# EAGLE board Lora AC Dimmer v1.2 (EAGLE 6.1)
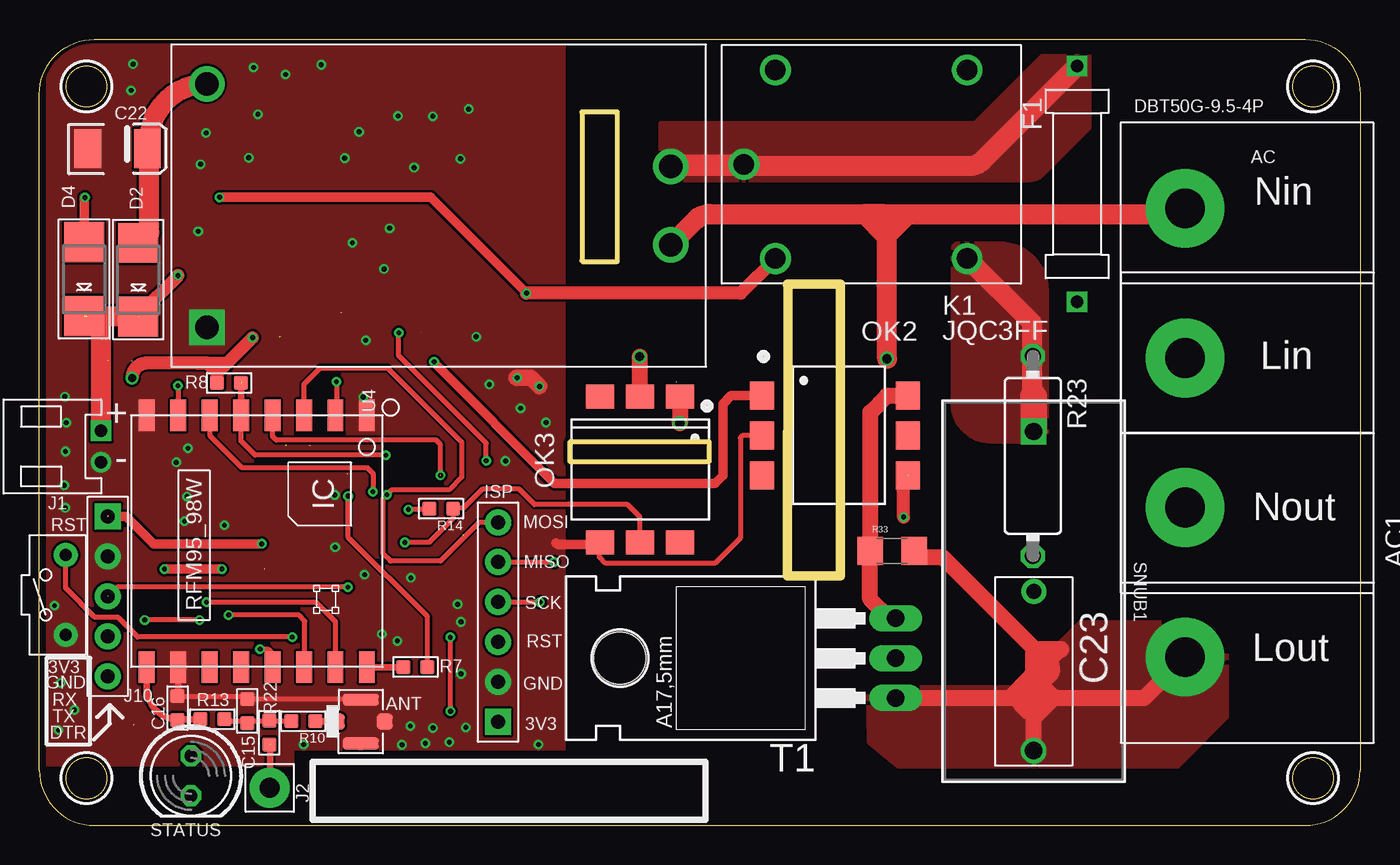
[diagram p0: board, top side]
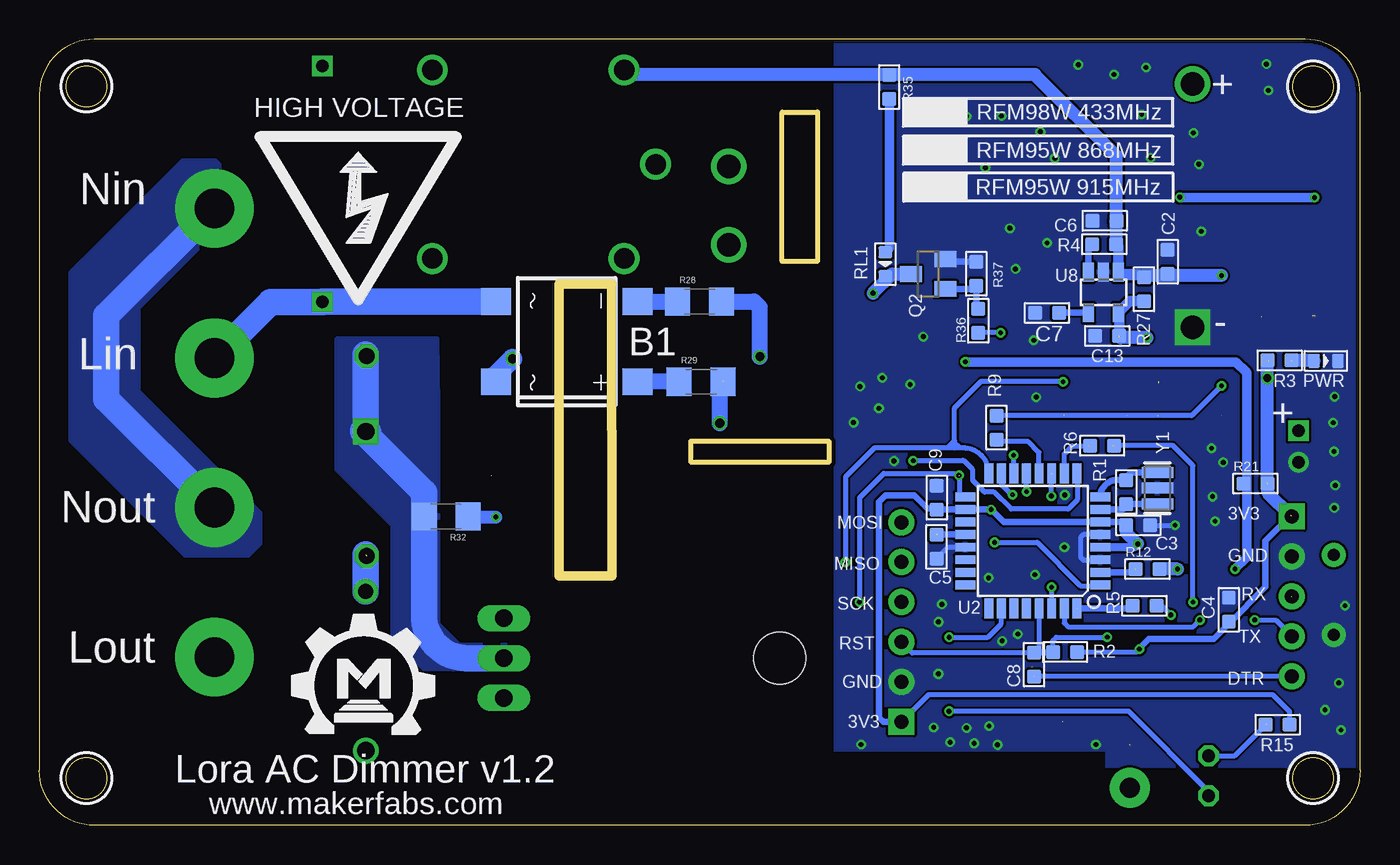
[diagram p1: board, bottom side, seen from below]

Size 84 x 50 mm. Coordinates in mm from the lower left corner, seen from the top.
Outline: 47.6,34.41 47.56,15.87 50.95,15.87 50.94,34.41 47.59,34.42 47.58,34.37
Outline: 33.78,24.42 42.57,24.42 42.57,23.13 33.76,23.13 33.76,24.41
Outline: 34.48,45.38 34.51,45.36 34.51,35.9 34.53,35.88 36.74,35.88 36.77,35.9 36.77,45.35 36.74,45.37 34.5,45.37
Outline: 0,3.5 0,46.5 arc-90 3.5,50 80.5,50 arc-90 84,46.5 84,3.5 arc-90 80.5,0 3.5,0 arc-90 0,3.5
Outline: circle at 81,3 radius 1.3
Outline: circle at 81,47 radius 1.3
Outline: circle at 3,3 radius 1.3
Outline: circle at 3,47 radius 1.3
Copper layers (1*16): Top 0.035mm / dielectric 1.5mm / Bottom 0.035mm
Design rules: minimum track width 6mil, minimum drill 12mil, track to track 6mil, track to pad 6mil, pad to pad 6mil, via to via 6mil, smd to smd 0mil, copper to edge 10mil, drill to drill 10mil, minimum pad ring 10mil, minimum via ring 6mil, stop-mask expansion 2mil, vias tented up to drill 100mil, thermal gap 0mil
Net classes: 0 default: width 0.152 mm, drill 0.305 mm, clearance 0.152 mm; 1 AC High Current: width 2.54 mm, drill 25.4 mm, clearance 1.27 mm; 2 gnd: width 0.305 mm, drill 0.559 mm, clearance 0.254 mm; 3 usbvcc: width 0.508 mm, drill 0.61 mm, clearance 0.254 mm
tRestrict: area 16.3,0 to 52.3,4.7; 5 lines
bRestrict: area 16.3,0 to 52.3,4.7; 2 lines

## Footprints (pad centres in the part's own frame; a part is rotated, then mirrored left to right if it is on the bottom)
THROUGH-HOLE-9.5 = drill 2.5 pad 5: 1 -9.5,0; 2 0,0; 3 9.5,0
4P-U-FL = smd 1.016 x 1.016: D -1.524,0; GND3 1.524,0 | smd 2.286 x 0.762: GND1 0,1.397; GND2 0,-1.397
DBS = smd 1.7 x 1.9: + -2.55,-4.5; - 2.55,-4.5; AC1 -2.55,4.5; AC2 2.55,4.5
0603 = smd 0.889 x 0.889: 1 -0.762,0; 2 0.762,0
EIA3528-KIT = smd 1.7 x 2.5: A 1.9,0; C -1.9,0
DISCRETE_C0512/10.18 = drill 0.95 pad 1.6: P$1 -5.09,0; P$2 5.09,0
SMADIODE = smd 2.54 x 2.54: A 2.349,0; C -2.349,0
FUSE01 = drill 0.8 square: P$1 -7.5,0; P$2 7.5,0
1X6P-2.54-8.5-BLACK-FEMALE = drill 0.889 pad 1.651 square: 1 0,6.35 | drill 0.889 pad 1.651: 2 0,3.81; 3 0,1.27; 4 0,-1.27; 5 0,-3.81; 6 0,-6.35
PH2.0-2P-90-DIP = drill 0.8 square: 1 0,1 | drill 0.8: 2 0,-1
1P-100/50MIL = drill 1.27 pad 2.54: 1 0,0
5P-2.54 = drill 0.889 pad 1.651 square: 1 0,5.08 | drill 0.889 pad 1.651: 2 0,2.54; 3 0,0; 4 0,-2.54; 5 0,-5.08
DIP5_JQC3FF = drill 1.3: 1 0,12; 2 -2,6; 3 0,0; 4 12.2,12; 5 12.2,0
DIL6-SMD = smd 1.78 x 1.52: 1 -2.54,-4.645; 2 0,-4.645; 3 2.54,-4.645; 4 2.54,4.645; 5 0,4.645; 6 -2.54,4.645
LED-0603 = smd 0.762 x 0.889: + -0.762,0; - 0.762,0
SOT23 = smd 1 x 1.4: 1 -0.95,-1.1; 2 0.95,-1.1; 3 0,1.1
R0603 = smd 0.889 x 0.889: 1 -0.762,0; 2 0.762,0
V234/12 = drill 1.016 octagon: 1 -6.35,0; 2 6.35,0
1206 = smd 1.6 x 1.8: 1 -1.4,0; 2 1.4,0
2P-7.62X3.56-90D = drill 0.762 pad 1.524: P$1 0,2.54; P$2 0,-2.54
RES_P409CP104M275AH151_KEM = drill 1.092 pad 1.6 square: 1 0,0 | drill 1.092 pad 1.6: 2 20.295,0
LED5MM = drill 0.813 octagon: A -1.27,0; K 1.27,0
TO220AB = drill 1.118 long: 1 -2.54,-6.35; 2 0,-6.35; 3 2.54,-6.35 | hole 3.302: 0,11.176
TQFP32 = smd 1.27 x 0.559: 1 -4.293,2.8; 2 -4.293,2; 3 -4.293,1.2; 4 -4.293,0.4; 5 -4.293,-0.4; 6 -4.293,-1.2; 7 -4.293,-2; 8 -4.293,-2.8; 17 4.293,-2.8; 18 4.293,-2; 19 4.293,-1.2; 20 4.293,-0.4; 21 4.293,0.4; 22 4.293,1.2; 23 4.293,2; 24 4.293,2.8 | smd 0.559 x 1.27: 9 -2.8,-4.293; 10 -2,-4.293; 11 -1.2,-4.293; 12 -0.4,-4.293; 13 0.4,-4.293; 14 1.2,-4.293; 15 2,-4.293; 16 2.8,-4.293; 25 2.8,4.293; 26 2,4.293; 27 1.2,4.293; 28 0.4,4.293; 29 -0.4,4.293; 30 -1.2,4.293; 31 -2,4.293; 32 -2.8,4.293
RFM92_93W = smd 2 x 1: 1 -8,7; 2 -8,5; 3 -8,3; 4 -8,1; 5 -8,-1; 6 -8,-3; 7 -8,-5; 8 -8,-7; 9 8,-7; 10 8,-5; 11 8,-3; 12 8,-1; 13 8,1; 14 8,3; 15 8,5; 16 8,7
HLK-PM01 = drill 1.5 square: GND 14.75,7.75 | drill 1.5: L -14.75,2.5; N -14.75,-2.5; VCC 14.75,-7.75
SOT23-5 = smd 0.69 x 1.2: 1 -0.95,-1.3; 2 0,-1.3; 3 0.95,-1.3; 4 0.95,1.3; 5 -0.95,1.3
RESONATOR = smd 0.7 x 2: 1 -1,0; 2 0,0; 3 1,0

## Placement (x,y rotation side)
AC  DBT50G-9.5-4P  [THROUGH-HOLE-9.5]  72.86,29.74 90 top
AC1  DBT50G-9.5-3P  [THROUGH-HOLE-9.5]  72.87,20.2 90 top
ANT  [4P-U-FL]  20.44,6.6 0 top
B1  DBLS201G  [DBS]  50.46,30.76 90 bottom
C2  10uF  [0603]  12.24,35.85 270 bottom
C3  100nF  [0603]  14.12,19.09 180 bottom
C4  10uF  [0603]  8.36,13.71 270 bottom
C5  100nF  [0603]  26.94,17.72 90 bottom
C6  10uF  [0603]  16.25,38.45 0 bottom
C7  NC  [0603]  19.92,32.59 0 bottom
C8  100nF  [0603]  20.74,10.23 90 bottom
C9  100nF  [0603]  26.92,20.86 270 bottom
C13  10uF  [0603]  16.09,31.14 0 bottom
C15  NC  [0603]  13.22,7.28 270 top
C16  NC  [0603]  8.79,7.46 270 top
C22  [EIA3528-KIT]  4.98,43.04 0 top
C23  0.01uF  [DISCRETE_C0512/10.18]  63.24,9.79 270 top
D2  SS24  [SMADIODE]  6.29,34.7 90 top
D4  SS24  [SMADIODE]  2.85,34.74 90 top
F1  FUSE01  [FUSE01]  66,40.8 270 top
ISP  CONNECTOR-HEADER-6P-3460270P1  [1X6P-2.54-8.5-BLACK-FEMALE]  29.18,12.93 180 top
J1  PH2.0-2P-90-DIP  [PH2.0-2P-90-DIP]  3.93,24.1 0 top
J2  [1P-100/50MIL]  14.66,2.38 0 top
J10  [5P-2.54]  4.35,14.56 0 top
K1  JQC3FF  [DIP5_JQC3FF]  46.81,36.05 0 top
OK2  MOC3021  [DIL6-SMD]  50.61,24.8 270 top
OK3  H11A1SM  [DIL6-SMD]  38.2,22.64 180 top
PWR  GREEN  [LED-0603]  2.17,29.55 0 bottom
Q2  [SOT23]  27.48,35.07 90 bottom
R1  1M  [R0603]  14.88,21.2 270 bottom
R2  10k  [R0603]  18.77,11.03 180 bottom
R3  330R  [R0603]  5.12,29.57 0 bottom
R4  1K  [R0603]  16.28,36.97 180 bottom
R5  0R  [R0603]  13.72,13.96 0 bottom
R6  0R  [R0603]  16.41,24.15 0 bottom
R7  0R  [R0603]  23.92,10.07 180 top
R8  100K  [R0603]  12.07,28.15 180 top
R9  0R  [R0603]  23.12,25.3 90 bottom
R10  0R  [R0603]  16.79,6.63 180 top
R12  100R  [R0603]  13.53,16.3 0 bottom
R13  0R  [R0603]  11,6.75 180 top
R14  10K  [R0603]  25.55,20.15 180 top
R15  330R  [R0603]  5.24,6.4 180 bottom
R21  10K  [R0603]  6.66,21.74 0 bottom
R22  0R  [R0603]  14.63,5.89 90 top
R23  150R  [V234/12]  63.19,23.5 270 top
R27  0R  [R0603]  13.75,34.11 270 bottom
R28  100k  [1206]  42.01,33.32 0 bottom
R29  100k  [1206]  41.91,28.22 0 bottom
R32  330R  [1206]  58.13,19.65 180 bottom
R33  330R  [1206]  54.24,17.46 0 top
R35  1K  [R0603]  29.95,46.96 270 bottom
R36  1K  [R0603]  24.29,32.1 90 bottom
R37  10K  [R0603]  24.41,35.09 90 bottom
RL1  BLUE  [LED-0603]  30.2,35.7 270 bottom
RST  [2P-7.62X3.56-90D]  1.68,14.66 180 top
SNUB1  100nF/150Ω  [RES_P409CP104M275AH151_KEM]  63.24,25.05 270 top
STATUS  [LED5MM]  9.65,3.15 270 top
T1  BT139  [TO220AB]  48.1,10.64 90 top
U2  ATMEGA328P  [TQFP32]  20.82,18.1 180 bottom
U4  RFM95_98W  [RFM92_93W]  13.84,18.07 270 top
U5  AC-DCHLK01  [HLK-PM01]  25.4,39.42 180 top
U8  SPX3819  [SOT23-5]  16.33,33.9 180 bottom
U$1  [MAKERFABS_0.3]  67.5,5.82 0 bottom
U$3  [HIGH-VOLTAGE-1.5]  63.72,40.68 180 bottom
Y1  CSTCE8M00 8MHZ  [RESONATOR]  12.89,21.45 90 bottom

## Library data of the parts
AC AC1 = self
ANT J1 J2 J10 = Connector
B1 = rectifier
C2-C9 C13 C15 C16 PWR R1-R10 R12-R15 R21 R22 R27 R35-R37 RL1 RST = Discrete
C22 = SparkFun-Capacitors
C23 = A9G
D2 D4 = adafruit
F1 = FUSE01
ISP = OPL Eagle Library
K1 = 1mytest
OK2 = optocoupler; MF: FAIRCHILD SEMICONDUCTOR; MPN: MOC3031SM; OC_FARNELL: unknown; OC_NEWARK: 34C1335
OK3 = optocoupler; OC_FARNELL: unknown; OC_NEWARK: unknown
Q2 = semicon-smd-ipc
R23 = adafruit2
R28 R29 R32 R33 = SparkFun-Resistors; K: 45K
SNUB1 = P409CP104M275AH151; BUILT_BY: EMA_Cory; COPYRIGHT: Copyright (C) 2018 Accelerated Designs. All rights reserved; DATASHEET: https://content.kemet.com/datasheets/KEM_F3089_P409_X2_275.pdf; MANUFACTURER_PART_NUMBER: P409CP104M275AH151; SOURCELIBRARY: Kemet_2020-05-21; VALUE: 100nF 150Ω; VENDOR: Kemet
STATUS = led
T1 = triac
U2 U8 = IC
U4 = dragino
U5 = Moja Knjižnica
U$1 U$3 = Logo
Y1 = SmartPrj

## Nets
3V3: C3.2 C4.2 C9.2 C13.2 ISP.1 J10.1 R2.1 R3.1 R8.2 R14.2 R15.1 R21.2 R27.2 U2.4 U2.6 U2.18 U4.13 U8.5
A0: U2.23
A1: U2.24
A2: U2.25
A3: STATUS.K U2.26
A4/SDA: U2.27
A5/SCL: U2.28
A6: U2.19
A7: U2.22
ANT: C16.2 R13.2 U4.9
AREF: C5.2 U2.20
D0/RX: J10.3 U2.30
D1/TX: J10.4 U2.31
D2/INT0: R5.1 U2.32
D3/INT1: OK3.5 R14.1 U2.1
D4: R12.1 U2.2
D5: R36.1 U2.9
D6: R6.1 U2.10
D7: R7.1 U2.11
D8: R9.1 U2.12
D9: U2.13 U4.6
D10: R8.1 U2.14 U4.5
D11/MOSI: ISP.6 U2.15 U4.3
D12/MISO: ISP.5 U2.16 U4.2
D13/SCK: ISP.4 U2.17 U4.4
DIO0: R5.2 U4.14
DIO1: R6.2 U4.15
DIO2: R7.2 U4.16
DIO5: R9.2 U4.7
DTR: C8.1 J10.5
GND: ANT.GND1 ANT.GND2 ANT.GND3 C2.1 C3.1 C4.1 C5.1 C6.1 C7.1 C9.1 C13.1 C15.1 C16.1 C22.C ISP.2 J1.2 J10.2 OK2.2 OK3.4 PWR.- Q2.2 R37.2 RST.P$1 U2.3 U2.5 U2.21 U4.1 U4.8 U4.10 U5.GND U8.2 Y1.2
L: AC1.3 AC.2 B1.AC2 F1.P$2
L_WIRE: F1.P$1 K1.2 U5.N
LINE: K1.5 R23.1 R32.2 SNUB1.1 T1.2
N: AC1.2 AC.1 AC.3 B1.AC1 U5.L
N$1: ANT.D R10.1
N$2: C23.P$1 R23.2
N$3: C7.2 U8.4
N$4: C15.2 R10.2 R13.1 R22.2
N$5: R15.2 STATUS.A
N$7: PWR.+ R3.2
N$9: AC1.1 C23.P$2 R33.2 SNUB1.2 T1.1
N$12: J2.1 R22.1
N$14: OK2.1 R12.2 R21.1
N$15: B1.- R28.1
N$16: OK2.4 R32.1
N$17: B1.+ R29.1
N$18: OK3.1 R29.2
N$19: OK3.2 R28.2
N$21: OK2.6 R33.1 T1.3
N$24: R4.2 U8.3
N$26: R35.2 RL1.+
N$27: D4.A K1.3 Q2.3 RL1.-
N$28: Q2.1 R36.2 R37.1
RESET: C8.2 ISP.3 R2.2 RST.P$2 U2.29
VCC: C22.A D2.A U5.VCC
VDD: C2.2 C6.2 D2.C D4.C J1.1 K1.1 R4.1 R27.1 R35.1 U8.1
XTAL1: R1.2 U2.7 Y1.1
XTAL2: R1.1 U2.8 Y1.3

## Tracks (layer width: path | path; a pad name or v marks a point on that pad's centre or on a via)
3V3  (via drill 0.3, 0.51)  (4 unrouted)
  Top 0.305: R14.2 24.73,20.09 v23.47,20.09 | v14.04,11.21 14.54,11.21 14.89,10.87 14.89,10.24 14.9,10.23 14.9,10.14 U4.13 | 10.1,29.41 10.67,29.41 arc-90 10.73,29.35
  Top 0.61: v14.15,17.91 7.28,17.91 5.54,19.65 J10.1
  Top 0.813: R8.2 11.31,28.77 | 11.31,28.77 v13.56,31.02 | 11.31,28.77 10.73,29.35 10.67,29.41 6.86,29.41 arc90 v5.9,28.45 | 10.1,29.41 11.93,29.41
  Bottom 0.305: v23.47,20.09 23.44,20.09 23.44,20.08 | R2.1 14.22,11.03 v14.04,11.21 | R15.1 4.48,7.22 5.57,8.31 27.45,8.31 ISP.1 | C4.2 8.36,12.93 8.38,12.93 8.38,12.8
  Bottom 0.406: v14.04,11.21 14.04,11.27 13.44,11.86 9.32,11.86 8.38,12.8 6.02,15.16 6.02,18.1 4.42,19.7 | ISP.1 30.33,6.58 30.33,6.59 30.61,6.87 30.61,20.56 30.19,20.98 28.35,20.98 27.51,20.14 26.94,20.14 26.91,20.17 26.91,20.11 C9.2 U2.18 arc-90 U2.18 25.1,20.09 v23.47,20.09 23.44,20.09 22.65,19.3 U2.6 15.09,19.3 C3.2 14.87,19.1 14.87,19.13
  Bottom 0.508: U2.4 14.36,17.7 v14.15,17.91
  Bottom 0.66: C13.2 15.32,32.55 U8.5 14.64,33.34 R27.2
  Bottom 0.813: v14.15,17.91 14.16,17.91 14.87,18.61 14.87,19.13 14.86,19.14 | v13.56,31.02 15.25,31.02 15.3,31.07 | 4.42,19.7 5.88,21.16 5.88,21.7 5.91,21.7 5.88,21.73 | R21.2 5.9,28.43 v5.9,28.45 5.9,29.49 arc90 5.88,29.51
A3  (via drill 0.3)
  Top 0.305: v26.15,7.26 v26.15,11.95 v26.14,11.96
  Bottom 0.305: STATUS.K 9.65,2.18 14.73,7.26 v26.14,7.26 v26.15,7.26 | v26.14,11.96 23.68,11.96 22.82,12.82 U2.26 | U2.26
ANT
  Top 0.406: R13.2 8.79,6.75 C16.2 8.82,6.7 8.82,6.74 arc-90 6.84,8.72 U4.9
AREF  (1 unrouted)
  Bottom 0.406: U2.20 26.93,18.5 arc-90 C5.2
D0/RX  (via drill 0.3)  (1 unrouted)
  Top 0.305: v19.62,15.15 4.98,15.15 4.39,14.56
  Bottom 0.305: U2.30 v19.62,15.15
D1/TX  (via drill 0.3)
  Top 0.305: v10.19,13.06 v6.71,13.06 v6.7,13.07
  Bottom 0.305: U2.31 18.82,12.88 18.58,12.64 10.62,12.64 v10.19,13.06 | 4.94,12.64 4.35,12.05 4.35,12.04 J10.4 4.36,12.04 5.38,13.07 v6.7,13.07
D2/INT0  (1 unrouted)
  Bottom 0.406: R5.1 14.64,13.81 U2.32
D3/INT1  (via drill 0.3)
  Top 0.305: OK3.5 38.2,19.63 37.42,20.41 31.48,20.41 30.5,21.39 28.2,21.39 26.98,20.18 26.34,20.18 R14.1 26.31,19.52 24.79,18 v23.25,18
  Bottom 0.305: v23.25,18 20.54,18 17.78,15.24 16.59,15.24 U2.1
D4  (1 unrouted)
  Bottom 0.406: U2.2 14.53,16.1 14.33,16.3
D5  (via drill 0.3)  (1 unrouted)
  Top 0.305: v28.42,23.19 28.42,24.32 22.86,29.88 v22.86,31.33
  Bottom 0.305: U2.9 17.99,22.36 17.99,20.68 18.56,20.11 22.2,20.11 23.28,21.2 23.89,21.2 24.64,21.94 24.64,22.62 25.21,23.2 25.28,23.2 | v28.42,23.19 25.28,23.19 25.28,23.2 | v22.86,31.33 22.87,31.34 24.29,31.34 | 25.34,23.2 25.3,23.2 25.28,23.2
D6  (1 unrouted)
  Bottom 0.305: U2.10 18.82,23.62 18.31,24.14 17.27,24.14 17.25,24.15
D7  (via drill 0.3)  (1 unrouted)
  Top 0.305: R7.1 24.68,13.28 19.64,18.32 v19.64,20.94 v19.64,20.95
  Bottom 0.305: v19.64,20.95 19.64,22.32 19.61,22.35
D8
  Bottom 0.305: U2.12 20.42,23.73 21.1,24.41 23,24.41 R9.1
D9  (via drill 0.3)
  Top 0.305: U4.6 10.84,24.79 12.88,22.75 20.86,22.75 U2.13 v21.22,21.23
  Bottom 0.305: v21.22,21.23 U2.13
D10  (via drill 0.3)  (2 unrouted)
  Top 0.305: v22.04,23.54 13.72,23.54 12.83,24.44 12.83,26 12.88,26.06
  Top 0.406: U4.5 12.84,28.22 12.83,28.22 12.86,28.22 12.92,28.16
  Bottom 0.305: U2.14 22.02,23.53 v22.04,23.54
D11/MOSI  (via drill 0.3)  (1 unrouted)
  Top 0.305: ISP.6 27.98,19.28 25.51,16.81 22.33,16.81 21.86,17.28 21.86,20.78 22.09,21.01 | U4.3 16.84,28.06 17.86,29.09 22.16,29.09 26.86,24.38 26.86,22.16 26.04,21.34 22.41,21.34 22.09,21.01 | v22.1,21.04 22.09,21.02 22.09,21.01
  Bottom 0.305: U2.15 22.81,21.67 22.18,21.04 v22.11,21.04
D12/MISO  (via drill 0.3)  (1 unrouted)
  Top 0.305: ISP.5 v32.74,16.74 | v18.89,28.22 18.89,26.15 18.81,26.07
  Bottom 0.305: 18.91,28.24 v18.89,28.22 18.93,28.25 24.09,28.25 25.79,26.56 25.79,24.43 | 25.79,24.03 25.79,24.33 | 25.79,24.33 25.79,24.43 | v32.74,16.74 32.72,16.76 32.72,22.18 30.89,24.01 25.79,24.01 arc90 25.79,24.01 25.79,24.03 | 26.24,24.01 26.24,24.02 25.8,24.45 25.79,24.43 | 23.65,22.76 23.65,22.42 U2.16 arc-90 25.26,24.03 25.79,24.03 | 25.46,24.02 25.82,24.39 25.82,24.37 arc-90 25.79,24.33
D13/SCK  (via drill 0.3)  (2 unrouted)
  Top 0.305: U4.4 14.83,26.05 14.83,24.75 15.07,24.51 25.23,24.51 25.52,24.23 v25.52,22.26 | ISP.4 31.7,14.2 v31.84,14.2
  Bottom 0.305: 25.49,22.26 25.61,22.39 30.29,22.39 31.84,20.84 v31.84,14.2 | 25.49,22.26 25.47,22.26 | 25.09,20.95 25.11,20.93 U2.17 25.15,20.9 25.2,20.95 25.48,20.95 25.5,20.96 25.5,22.25 25.49,22.26
DIO0  (via drill 0.3)
  Top 0.305: U4.14 16.88,10.12 16.88,13 16.51,13.38 v12.04,13.38
  Bottom 0.305: v12.04,13.38 12.62,13.96 13,13.96 13,13.95 13.01,13.95 12.98,13.95 R5.2
DIO1  (via drill 0.3)  (1 unrouted)
  Top 0.305: U4.15 18.84,12.95 17.6,14.19 10.64,14.19 v10.63,14.2
  Bottom 0.305: v10.63,14.2 10.63,22.88 11.91,24.16 15.72,24.16
DIO2  (1 unrouted)
  Top 0.406: R7.2 23.15,10.06 U4.16
DIO5  (via drill 0.3)  (1 unrouted)
  Top 0.305: v8.82,27.95 8.82,26.06 8.8,26.05
  Bottom 0.305: v8.82,27.95 10.71,26.07 23.22,26.07 23.21,26.06 R9.2
DTR  (1 unrouted)
  Bottom 0.305: J10.5 20.76,9.48 20.79,9.45
GND  (via drill 0.3)
  Top 0.305: 8.84,8.22 13.1,8.22 13.31,8.01 | C15.1 20.41,8.04 ANT.GND1 20.53,8 20.6,8.07 | U4.1 20.86,26.07 20.87,26.09 | OK2.2 44.73,24.8 44.59,24.66 44.59,18.29 42.97,16.67 36.02,16.67 35.62,17.07 35.62,17.87 35.63,17.88
  Top 0.406: C16.1 8.84,8.22 U4.10
  Top 0.61: 35.63,17.88 35.47,17.88 | 35.47,17.88 32.94,17.88 32.87,17.95 | OK3.4 35.59,18 35.47,17.88
  Top 1.016: v31.8,27.92 31.26,28.46 30.32,28.46 30.33,28.47 v30.39,28.47
  Bottom 0.305: C5.1 26.91,16.96 26.17,17.7 U2.21 | C3.1 11.79,19.09 v11.78,19.1 | U2.5 17.6,18.5 17.79,18.3 17.79,17.07 17.61,16.88 16.67,16.88 | 16.67,16.88 16.65,16.87 | U2.3 16.66,16.9 16.67,16.88 | v20.75,30.85 v20.76,30.85 v20.77,30.84
  Bottom 0.406: Q2.2 26.22,35.86 24.45,35.86
  other vias: 21.92,35.39 21.77,12.17 30.61,26.53 13.91,45.23 27.12,6.23 22.77,11.73 2.24,7.35 26.82,9.64 26.82,12.94 23.84,41.84 1.66,23.78 25.02,45.1 22.28,37.98 23.6,6.32 1.22,6.06 26.08,5.29 26.6,14.06 17.93,48.38 1.36,9.06 27.78,31.09 9.23,19.35 9.38,20.92 1.59,21.62 18.81,17.69 9.46,23.99 20.68,15.95 18.78,21.02 13.63,48.2 1.62,27.27 10.26,42.05 26.78,42.4 5.96,48.42 16.81,5.13 5.84,46.74 32.22,25.63 1.65,20.19 19.91,37.05 15.66,47.76 1.72,25.6 13.32,42.47 8.71,23.09 0.97,13.98 10.1,37.78 24.55,5.22 28.61,28.05 23.07,5.12 25.04,6.2 31.74,5.14 27.31,45.56 10.61,44.05 19.42,42.44 20.34,44.12 22.81,45.13 23.63,15.75 20.6,27.24 29.64,23.18
  pour Bottom: -1.06,51.63 33.33,51.63 33.33,3.81 -1.06,3.81 -1.06,51.62
  pour Top: -1.06,51.69 33.32,51.69 33.32,3.87 -1.07,3.87 -1.07,51.68
L
  Top 1.27: AC1.3 72.87,29.73 AC.2
  Bottom 1.27: 65.98,33.31 F1.P$2
  Bottom 1.676: B1.AC2 65.98,33.31 | F1.P$2 69.3,33.3 AC.2
L_WIRE
  Top 1.27: F1.P$1 60,42.3 arc-45 59.1,41.93 40.08,41.93 arc45 40.11,41.92 U5.N arc45 40.2,41.9 40.43,41.9 arc-45 40.8,42.05 K1.2
  pour Top: 39.51,41.06 62.96,41.06 arc45 63.86,41.43 66.8,44.37 66.8,48.92 66.79,48.93 63.74,48.93 59.47,44.66 39.49,44.66 39.47,44.65 39.47,41.08 39.49,41.06
LINE
  Top 1.27: 59,36.08 63.12,31.97 63.12,27.52 arc90 63.28,27.35
  Top 1.676: SNUB1.1 63.24,27.24 63.21,27.27
  Bottom 0.254: SNUB1.1 63.26,25.08 63.41,25.08 | R32.2 59.52,19.66 | 59.53,19.7 59.51,19.72 59.51,19.86 | 63.09,25.03 63.07,25.02 63.07,24.93 63.17,25.03 63.29,25.03 63.32,25.06 63.42,25.06
  Bottom 1.016: 59.53,19.7 arc90 59.5,19.73
  Bottom 1.676: T1.2 56.82,10.64 arc90 59.53,13.35 59.53,19.7 59.53,21.18 63.37,25.02 63.27,25.02 SNUB1.1 63.26,25.03 63.29,25.03 | 63.41,25.08 63.25,25.08 63.25,29.93 | 63.09,25.03 63.17,25.03 63.2,25.07 63.26,25.07 63.3,25.02 63.26,24.97
  pour Top: 61.05,37.04 arc-90 64.06,34.03 64.06,24.4 60.51,24.4 arc-90 58.09,26.82 58.09,36.64 arc-90 58.5,37.04
  pour Bottom: 53.32,11.42 57.31,11.42 58.7,12.81 58.7,26.74 58.76,30.93 65.04,30.9 65.03,26.94 65.03,22.66 61.47,19.1 61.47,11.95 59.53,10.01 53.31,9.95
N  (via drill 0.6)
  Top 0.813: 72.64,38.87 72.94,39.18 73.06,39.18 73.12,39.24 73.02,39.24 72.94,39.16 72.94,39.33 72.89,39.39 72.89,39.26 72.85,39.22 | 72.85,39.22 72.87,39.2 73.2,39.2 73.31,39.08 73.29,39.08 73.1,39.28 73.1,38.79 73.04,38.73 72.98,38.73 72.83,38.89 72.83,39.02 72.96,39.16 72.96,39.51 73,39.55 72.48,39.55 72.4,39.62 72.4,39.55 72.75,39.2 72.62,39.2 72.38,39.43 72.67,39.43 72.92,39.18 72.83,39.18 72.34,39.66 72.5,39.66 72.65,39.51 72.65,39.26 72.77,39.14 | 72.85,39.22 72.85,39.23 AC.3
  Top 1.27: U5.L 41.75,38.52 arc-45 42.65,38.89 53.67,38.89 | 53.67,38.89 73.05,38.89 72.98,38.96 arc-45 AC.3 | v53.9,29.69 53.9,38.8 53.92,38.82 53.87,38.82 53.81,38.75 | 53.81,38.75 53.95,38.75 53.97,38.74 | 53.67,38.89 53.81,38.75 | 53.88,37.49 52.47,38.9 53.64,38.9 53.67,38.86 | 53.88,37.49 | 53.88,37.49 55.24,38.85 55.24,38.86 | 53.67,38.89 53.67,38.86 | 53.67,38.86 53.71,38.82
  Bottom 0.813: 72.91,39.2 72.9,39.2 AC.3
  Bottom 1.016: AC1.2 72.86,20.21 AC.1
  Bottom 1.27: B1.AC1 54.96,28.63 v53.9,29.69
  Bottom 1.676: 72.91,39.2 72.96,39.2 79.73,32.43 79.73,27.11 AC.1
  pour Bottom: 71,39.71 71,40.43 72.8,42.23 74.89,42.23 81.95,35.17 81.95,24.48 74.71,17.24 70.72,17.24 70.03,17.93 70.03,19.89 77.79,27.64 77.79,32.91 71.05,39.65
N$1  (1 unrouted)
  Top 0.406: R10.1 18.93,6.63 ANT.D
N$2  (1 unrouted)
  Bottom 0.406: 63.26,17.27 63.26,17.29 63.28,17.3 63.28,17.31 63.24,17.28 63.24,17.24
  Bottom 1.676: C23.P$1 63.24,17.24
N$3  (1 unrouted)
  Bottom 0.406: U8.4 19.19,32.6
N$4
  Top 0.305: 14.64,6.63 R10.2 16.02,6.63 16,6.61 | 14.64,6.63 13.21,6.63 | 13.21,6.63 11.89,6.63 | 11.89,6.63 11.79,6.73 R13.1 | 11.89,6.63 11.89,6.64 11.81,6.72 11.83,6.72 11.87,6.68 11.84,6.68 11.83,6.67 | C15.2 13.22,6.62 13.21,6.63 | R22.2 14.64,6.63
N$5  (1 unrouted)
  Bottom 0.305: STATUS.A 7.99,4.42 5.98,6.43
N$7  (1 unrouted)
  Bottom 0.813: PWR.+ 4.38,29.56
N$9
  Top 0.406: R33.2 55.64,17.14 55.59,17.09 55.59,17.07 55.58,17.06
  Top 1.016: T1.1 63,8.1 | 63,8.1 70.27,8.1 AC1.1 | SNUB1.2 63.24,7.77 | 63.24,7.77 63.24,7.86 | 63.24,7.86 63,8.1 | 61.68,8.12 63.09,9.53 63.15,9.53 64.53,8.14 64.55,8.14 63.27,6.87 62.75,7.38 | 62.75,7.38 62,8.13 62,8.16 | 55.58,17.06 57.45,17.06 64.39,10.12 64.39,9.73 64.34,9.68 64.34,9.64 63.3,8.6 63.3,7.84 63.29,7.82 63.21,7.82 63.19,7.84 63.19,7.91 63.22,7.88 63.22,7.75 | 63.24,7.77 63.26,7.8 | 63.26,7.8 | 63.26,7.8 63.23,7.83 63.19,7.83 63.24,7.78 63.24,7.73 63.3,7.73 63.31,7.74 63.31,7.81 63.25,7.87 63.21,7.87 | 63.23,7.86 62.76,7.38 62.75,7.38 | 63.24,7.86 63.23,7.86 | 63.23,7.86 63.23,7.85 | 63.18,11.29 63.18,9.49 64.89,11.21 65,11.21 64.98,11.19 63.22,11.19
  pour Top: 52.77,8.73 62,8.73 66.19,12.85 73.76,12.85 75.46,11.15 75.46,6.9 72.39,3.82 54.65,3.82 52.81,5.3
N$12  (1 unrouted)
  Top 0.406: J2.1 14.67,5.15
N$14  (via drill 0.3)
  Top 0.61: v25.11,29.48 25.12,29.47 25.12,29.45 25.1,29.43 32.78,21.75 42.98,21.75 43.47,22.24 43.47,26.82 43.99,27.34 46.07,27.34 46.11,27.3 45.99,27.3 OK2.1 45,27.34 | v7.96,16.3 v11.61,16.3
  Bottom 0.305: R21.1 7.42,21.69 7.44,21.66 7.44,21.7 7.4,21.74 7.33,21.74 7.22,21.63
  Bottom 0.61: v25.11,29.48 7.91,29.48 7.22,28.79 7.22,21.63 7.22,17.05 v7.96,16.3
  Bottom 0.813: v11.61,16.3 12.69,16.3 12.71,16.28 12.73,16.3 R12.2
N$15
  Bottom 0.61: R28.1
  Bottom 1.016: B1.- R28.1
N$16  (via drill 0.3)  (1 unrouted)
  Top 0.406: 54.97,21.97 55.27,22.27
  Top 0.813: v54.97,19.61 54.97,21.97
  Bottom 0.406: R32.1 56.69,19.61
  Bottom 0.813: 56.69,19.61 v54.97,19.61
N$17
  Bottom 0.406: B1.+ 45.97,28.21 45.97,28.22
  Bottom 0.61: 46.15,28.22
  Bottom 1.016: R29.1 45.97,28.22 46.15,28.22
N$18  (via drill 0.6)  (1 unrouted)
  Top 1.016: OK3.1 40.74,25.61 v40.72,25.59
  Bottom 1.016: v40.72,25.59 40.72,28 R29.2
N$19  (via drill 0.56)
  Top 0.61: OK3.2 38.22,27.29 38.24,27.27
  Top 1.016: v38.17,29.82 38.17,27.33 38.24,27.27 38.34,27.17
  Bottom 1.016: R28.2 38.55,33.32 38.2,32.96 38.2,29.84 v38.17,29.82
N$21
  Top 1.016: T1.3 54.08,13.18 52.84,14.42 R33.1 52.84,26.27 53.9,27.33 OK2.6
N$24
  Bottom 0.406: U8.3 17.29,35.22 17.29,36.91 17.25,36.95 17.09,36.95 17.07,36.97 R4.2
N$26
  Bottom 0.61: R35.2 29.95,36.71 RL1.+
N$27  (via drill 0.3)
  Top 0.61: D4.A 2.85,39.88 arc-90 v2.9,39.93 | v11.47,39.95 24.87,39.95 v30.98,33.85
  Top 0.813: K1.3 44.61,33.85 v30.98,33.85
  Bottom 0.61: v2.9,39.93 11.45,39.93 v11.47,39.95 | RL1.- 30.2,34.63 v30.98,33.85
  Bottom 0.813: v30.98,33.85 29.76,35.07 Q2.3 28.56,35.06 28.56,35.02
N$28
  Bottom 0.406: Q2.1 24.63,34.12 R37.1 24.41,32.98 R36.2
RESET  (via drill 0.3)
  Top 0.305: v16.08,11.97 6.26,11.97 5.07,13.16 5,13.23 3.54,13.23 1.67,15.1 RST.P$2
  Bottom 0.305: U2.29 20.42,11.11 20.57,10.96 20.79,10.96 | 20.79,10.96 20.79,10.97 19.57,10.97 19.57,10.99 R2.2 | R2.2 19.64,11.03 20.7,11.03 C8.2 | 20.79,10.96 28.48,10.96 ISP.3 | R2.2 19.53,11.78 19.33,11.97 v16.09,11.97 v16.08,11.97
VCC
  Top 1.27: 7,43.24 7,37.76 arc-90 D2.A | 7,43.24 7,43.52 arc-90 U5.VCC | C22.A 6.88,43.13 arc-90 7,43.24
VDD  (via drill 0.3)  (2 unrouted)
  Top 0.813: v8.82,34.98 6.27,32.43 6.27,32.36
  Top 1.27: J1.1 3.93,31.52 arc90 3.04,32.41 6.24,32.41 arc-90 D2.C
  Bottom 0.406: 15.52,37.03 15.5,37.03 15.37,36.91 U8.1 15.04,34.87 R27.1 13.81,34.81 13.83,34.81
  Bottom 0.61: R35.1 29.93,47.73 29.93,47.69 29.91,47.69 29.84,47.76
  Bottom 0.66: 13.83,34.81 14.09,35.07 15.35,35.07 | R4.1 15.38,36.83 U8.1
  Bottom 0.813: 15.5,37.03 15.5,38.41 | 15.5,38.41 15.5,42.58 20.68,47.76 29.84,47.76 46.64,47.76 46.83,47.95 46.81,47.97 K1.1 | R35.1 29.84,47.72 R35.1 | v8.82,34.98 12.33,34.98 | 12.33,34.98 13.64,34.98 | 13.64,34.98 R27.1 | 13.64,34.98 13.8,34.98 | C2.2 12.24,35.07 12.33,34.98 | C6.2 15.52,38.45 15.56,38.41 15.5,38.41
XTAL1
  Bottom 0.406: Y1.1 arc90 12.91,20.44 R1.2 arc90 15.22,20.1 U2.7
XTAL2
  Bottom 0.406: Y1.3 14.38,22.45 arc-90 R1.1 15.46,21.96 arc-90 U2.8

## Text on the board
tPlace: Nin | Lin | U4 | + | - | MOSI | Nout | MISO | SCK | RST | 3V3 | Lout | GND | GND | RX | TX | 3V3 | DTR
bPlace: + | RFM98W 433MHz | RFM95W 868MHz | RFM95W 915MHz | Nin | - | Lin | + | 3V3 | MOSI | Nout | GND | MISO | RX | SCK | TX | RST | DTR | Lout | GND | 3V3 | Lora AC Dimmer v1.2 | www.makerfabs.com